# Altium PCB MJVESC_MINI_VER03.PcbDoc (part 2 of 3)
Units mm, origin at the board's own origin, x right, y up, seen from the top; angles counter-clockwise.
Board outline 57.82 x 58.2 mm, 4 copper layers (Top Layer, Mid Layer 1, Mid Layer 2, Bottom Layer), stack 1.63 mm thick; 123 components, 106 nets, 471 pads, 471 vias.
Unrouted connection lines stored in the file: 33.
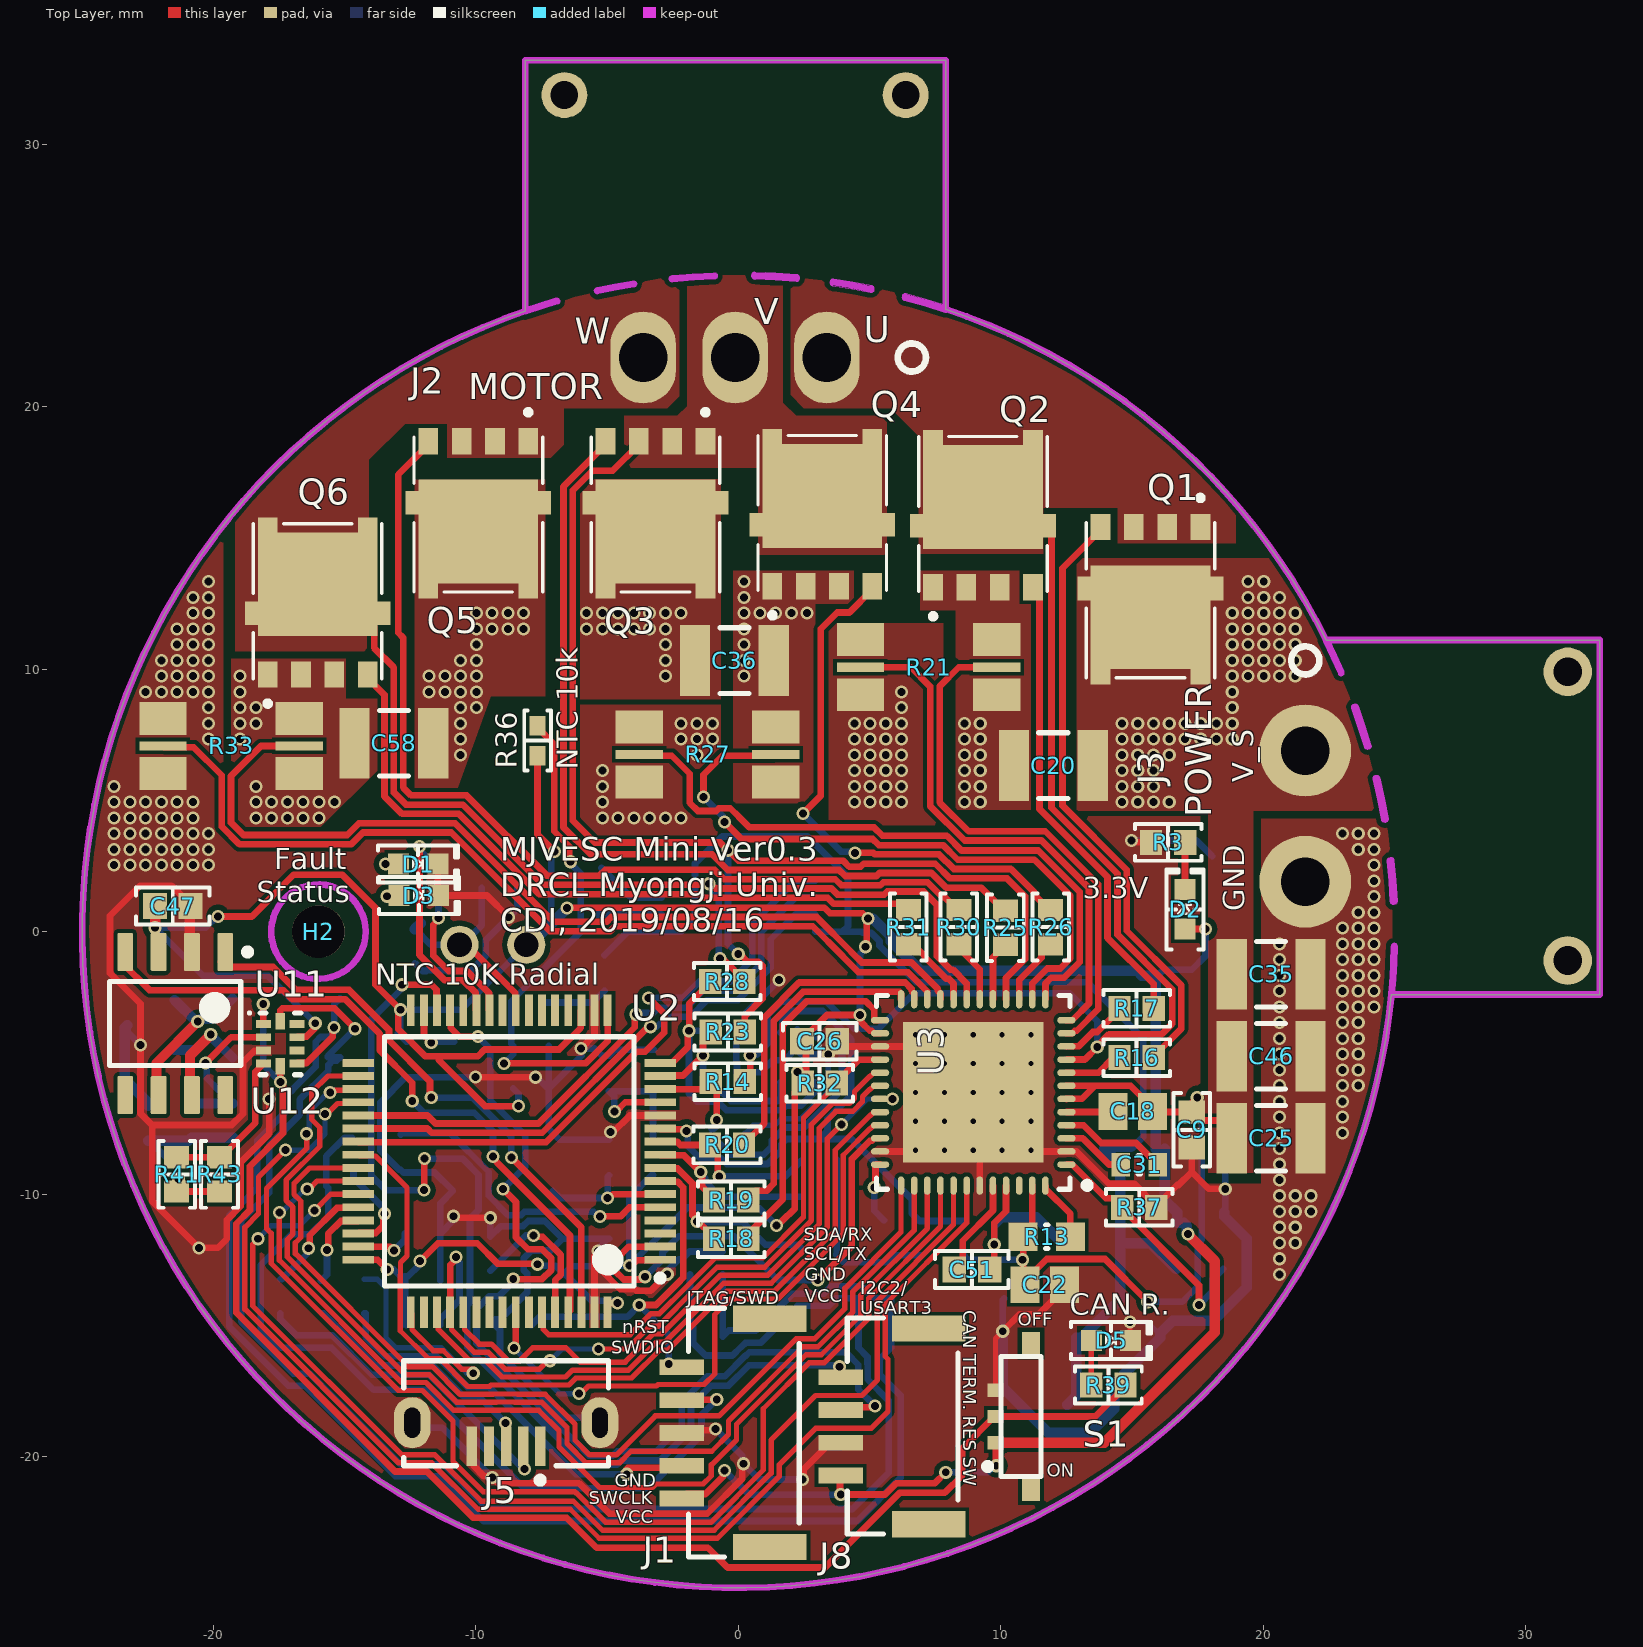
[diagram p0: Top Layer view]

## Via types
v1: diameter 0.5, hole 0.3, Top Layer to Bottom Layer, tented both sides, 446 vias
v2: diameter 0.5, hole 0.2, Top Layer to Bottom Layer, 25 vias

## Nets (pads, with @x,y where several pads share a name; then routed paths per layer and width w, separated by ;. In a path a pad name is that pad's centre, name@x,y a point inside that pad or via, vN(x,y) a via of type N, cw(c..) or ccw(c..) an arc to the next point about the centre after c; other vN are vias at no path point) (continued)
EN_GATE: (continued)
  Top Layer w0.203: v1(-6.075,-17.601) -5.995,-17.601 -5.705,-17.311 -3.117,-17.311 -3.063,-17.257 -1.301,-17.257 -0.9,-16.856 -0.9,-14.594 -0.304,-13.998 1.504,-13.998 3.996,-11.507 3.996,-8.521 5.018,-7.499 5.039,-7.499 5.162,-7.375 U3.33@5.4,-7.375
  Top Layer w0.254: v1(-8.552,-15.864) -8.552,-15.797 -8.479,-15.724 U2.57@-8.479,-14.503
  Bottom Layer w0.203: v1(-8.552,-15.864) -6.815,-17.601 v1(-6.075,-17.601)
GHA: R16.1 U3.8 | length 2.3
  Top Layer w0.254: U3.8@12.5,-5.375 13.725,-5.375 14.3,-4.8 R16.1@14.525,-4.8
GHB: R25.1 U3.17 | length 2.3
  Top Layer w0.254: U3.17@9.7,-2.575 9.7,-0.975 R25.1@10.175,-0.5
GHC: R30.1 U3.18 | length 2.4
  Top Layer w0.254: R30.1@8.4,-0.475 8.4,-0.631 9.2,-1.431 U3.18@9.2,-2.575
GLA: R17.1 U3.10 | length 2.7
  Top Layer w0.254: U3.10@12.5,-4.375 12.502,-4.373 12.958,-4.373 13.508,-3.823 13.677,-3.823 14.525,-2.975 R17.1@14.525,-2.925
GLB: R26.1 U3.15 | length 2.9
  Top Layer w0.254: U3.15@10.7,-2.575 U3.15@10.7,-2.575 10.702,-1.843 11.552,-0.993 11.552,-0.773 11.825,-0.5 R26.1@12.15,-0.5
GLC: R31.1 U3.20 | length 3
  Top Layer w0.254: R31.1@6.475,-0.475 6.653,-0.475 7.1,-0.922 7.1,-0.967 7.933,-1.8 8.025,-1.8 8.2,-1.975 U3.20@8.2,-2.575 ; R31.1@6.475,-0.375 R31.1@6.489,-0.389